# Altium PCB PCB2.PcbDoc
Units mm, origin at the board's own origin, x right, y up, seen from the top; angles counter-clockwise.
Board outline 36.2 x 17.02 mm, 2 copper layers (Top Layer, Bottom Layer); 14 components, 8 nets, 36 pads, 3 vias.
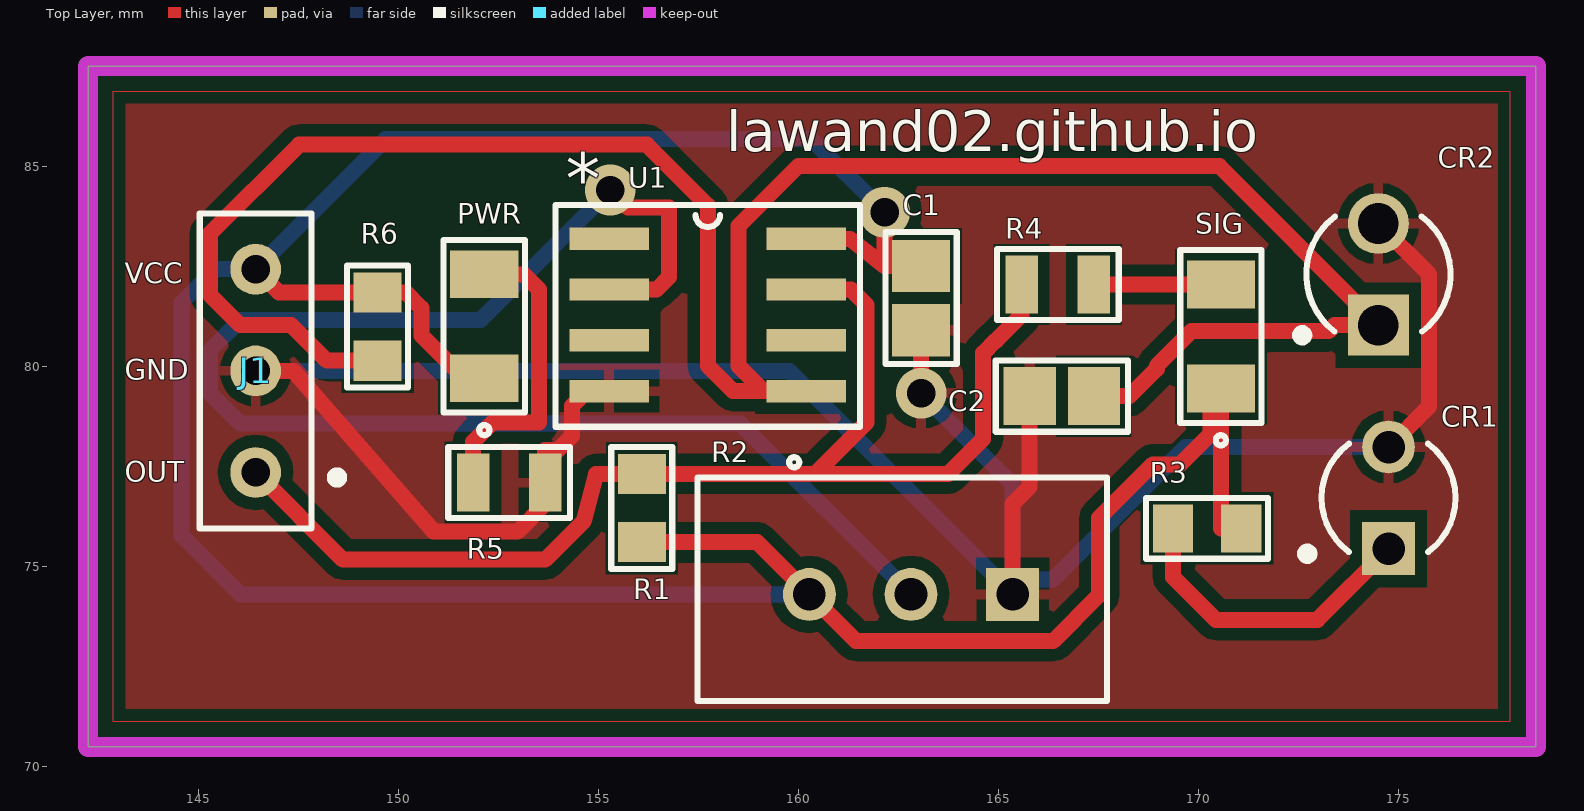
[diagram p0: Top Layer view]
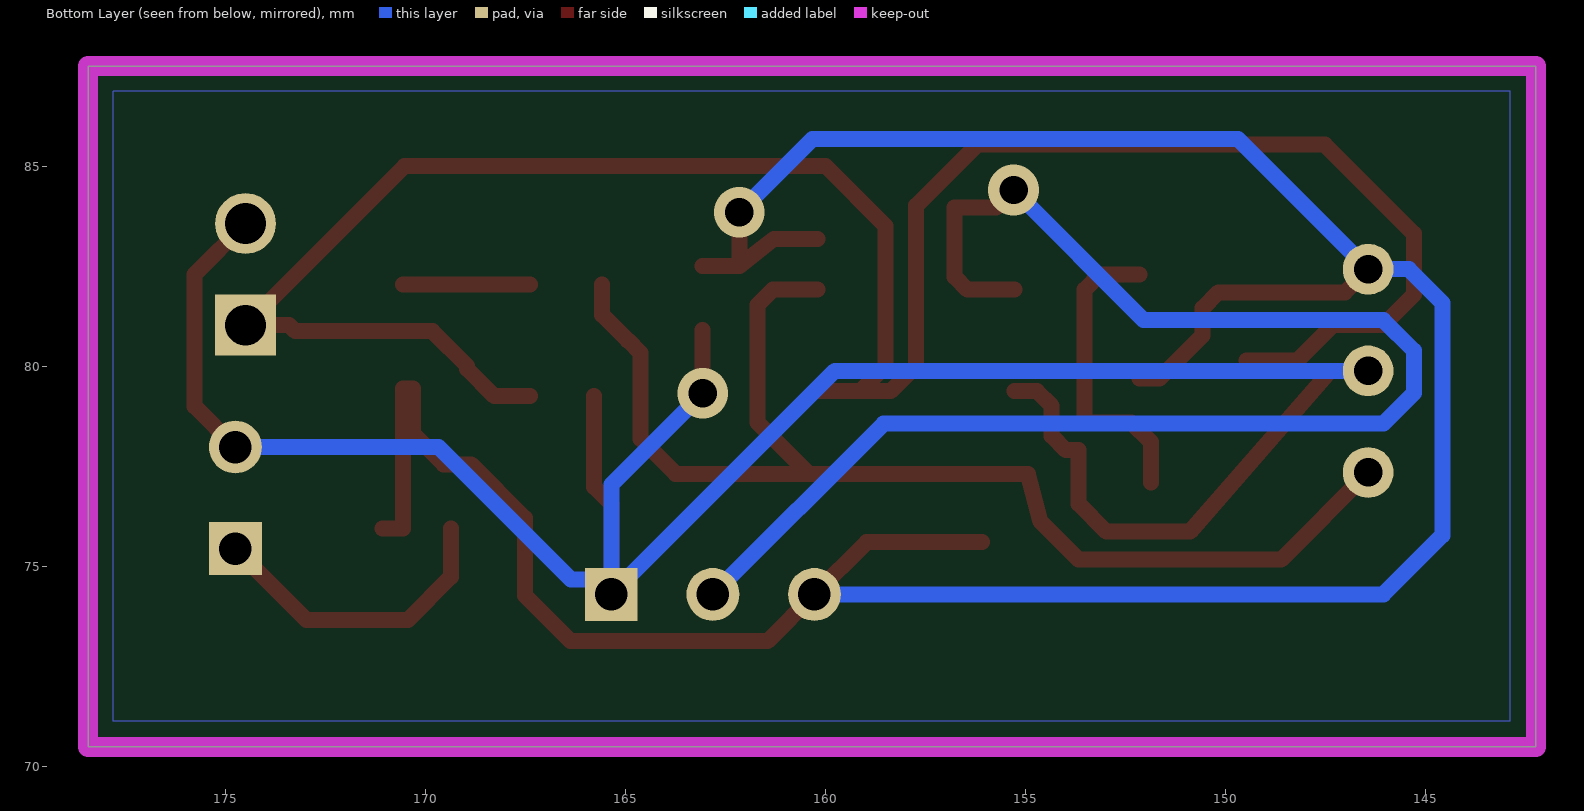
[diagram p1: Bottom Layer view, seen from below]
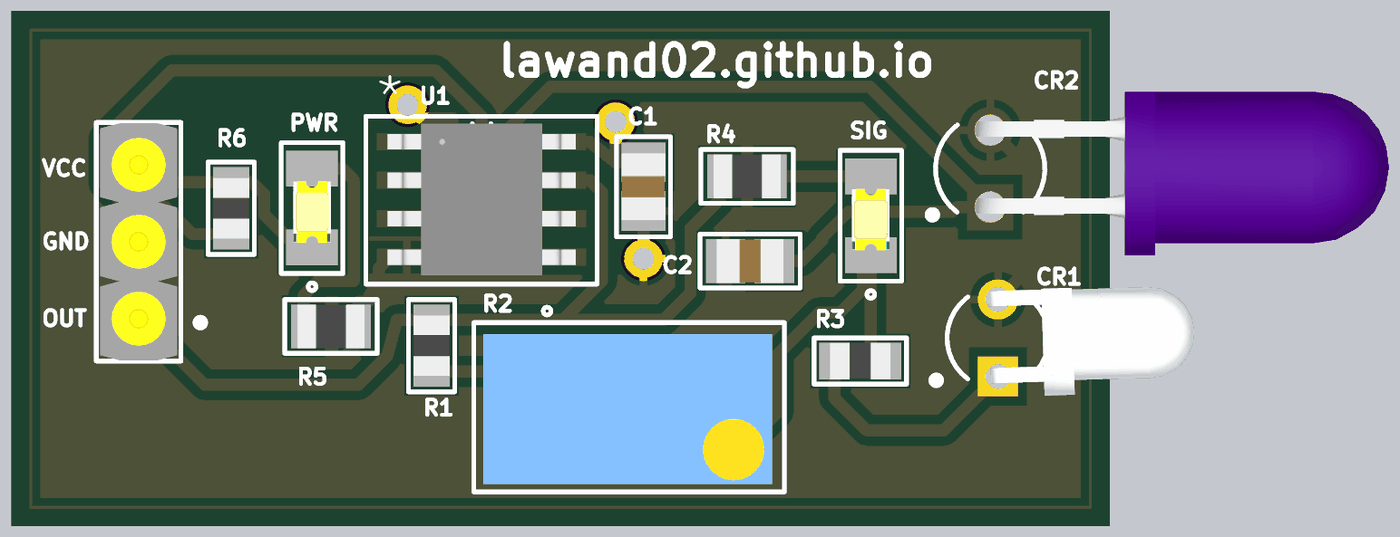
[diagram p2: 3D render of the assembled board from above, using the file's embedded part models]

## Layer stack, top to bottom
Top Solder: solder mask 0.0102, Solder Resist, Dk 3.5
Top Layer: signal copper 0.0356
Dielectric 1: dielectric 0.32, FR-4, Dk 4.8
Bottom Layer: signal copper 0.0356
Bottom Solder: solder mask 0.0102, Solder Resist, Dk 3.5

## Board outline
142.24,70.485 142.24,87.503 178.435,87.503 178.435,70.485

## Design rules (kind name [scope] priority, off if disabled: settings)
Clearance polygon [InNamedPolygon('NONET_L01_P000')] p1: gap=0.5 ignorepadtopadclearanceinfootprint=FALSE
Clearance [All] p2: gap=0.3 ignorepadtopadclearanceinfootprint=FALSE
PolygonConnect [All] p1: connectstyle=Relief reliefconductorwidth=0.254 reliefentries=4 polygonreliefangle="90 Angle" airgapwidth=0.254
RoutingVias [All] p1: holewidth=0.711 width=1.27 viastyle="Through Hole" minholewidth=0.711 minwidth=1.27 maxholewidth=0.711 maxwidth=1.27
SolderMaskExpansion [All] p1: expansion=0.102 istentingtop=FALSE
Width [All] p1: maxlimit=0.5 minlimit=0.254 preferedwidth=0.4
30 further rules are at their usual default settings.

## Components (designator, comment, footprint, x,y, rotation, side; value= is the part's Value field where it differs from the comment)
C1 "100 nF" C0805C104M8RAC7800 163.068,81.702 r90 top
C2 "100 nF" C0805C104M8RAC7800 166.583,79.248 r0 top
CR1 "TEPT4400" TEPT4400 174.752,75.438 r90 top
CR2 "TSAL6200" TSAL6200 174.498,83.566 r90 top
J1 "TS-103-T-A" TS-103-T-A 146.431,79.883 r90 top
PWR "POWER LED" CMD15-21VRD/TR8 152.146,80.996 r90 top (schematic designator LED2)
R1 "10 K" ERJ-6GEYJ103V 156.083,76.454 r270 top
R2 "10 K" 3296W-1-103LF 165.354,74.295 r180 top
R3 "100 R" RC0805N_PAN 170.216,75.946 r0 top
R4 "1 K" RNCF0805TKY1K00 166.484,82.042 r0 top
R5 "1 K" RNCF0805TKY1K00 152.768,77.089 r180 top
R6 "10 K" ERJ-6GEYJ103V 149.479,80.99 r90 top
SIG "SWITCH LED" CMD15-21VRD/TR8 170.561,80.742 r90 top (schematic designator LED1)
U1 "LM393DR" LM393DR 157.734,81.28 r0 top

## Footprints (in the part's own frame and the unit in brackets; to place one, negate y for a bottom-side part, rotate by r counter-clockwise, add the part's x,y. Pads: shape width x height; smd on the part's side, far side on the other; paste and mask are expansions set on the pad)
3296W-1-103LF [mil]
  round 52 / inner round 60 / far side round 52 hole 32 paste-26 mask+0: 1(200,0) 2(100,0)
  rect 52x52 / inner round 60 / far side rect 52x52 hole 32 paste-26 mask+0: 3(0,0)
  silkscreen extent -93,-135 310,105, body extent -77,-100 298,95, height 378
C0805C104M8RAC7800 [mm]
  rect 1.306x1.45 smd paste+0 mask+0: 1(-0.803,0) 2(0.803,0)
  silkscreen extent -1.65,-0.89 1.65,0.89, body extent -1.1,-0.72 1.1,0.72, height 0.88
CMD15-21VRD/TR8 [mil]
  rect 47x67 smd paste+0 mask+0: 1(-51.18,0) 2(51.18,0)
  silkscreen extent -107,-40 85,40, body extent -45,-25 35,25, height 43
ERJ-6GEYJ103V [mm]
  rect 1.006x1.2 smd paste+0 mask+0: 1(-0.853,0) 2(0.853,0)
  silkscreen extent -1.52,-0.76 1.52,0.76, body extent -1,-0.6 1,0.6, height 0.71
LM393DR [mil]
  rect 78x22 smd paste-39 mask-39: 1(-97,75) 2(-97,25) 3(-97,-25) 4(-97,-75) 5(97,-75) 6(97,-25) 7(97,25) 8(97,75)
  silkscreen extent -150,-110 150,108, body extent -122,-99 122,99, height 69
RC0805N_PAN [mm]
  rect 1.006x1.2 smd paste+0 mask+0: 1(-0.853,0) 2(0.853,0)
  silkscreen extent -1.52,-0.76 1.52,0.76, body extent -1,-0.6 1,0.6, height 0.71
RNCF0805TKY1K00 [mil]
  rect 32x57 smd paste+0 mask+0: 1(-35.5,0) 2(35.5,0)
  silkscreen extent -60,-35 60,35, body extent -44,-29 44,29, height 26
TEPT4400 [mil]
  rect 52x52 / inner round 60 / far side rect 52x52 hole 32 paste-26 mask+0: 1(0,0)
  round 52 / inner round 60 / far side round 52 hole 32 paste-26 mask+0: 2(100,0)
  silkscreen extent -10,-66 103,85, body extent -131,-309 240,113, height 144
TS-103-T-A [mil]
  round 50 / inner round 60 / far side round 50 hole 28 paste-25 mask+0: 1(-100,0) 2(0,0) 3(100,0)
  silkscreen extent -155,-85 155,55, body extent -154,-50 154,50, height 327
TSAL6200 [mil]
  rect 60x60 / inner round 60 / far side rect 60x60 hole 40 paste-30 mask-30: 1(-100,0)
  round 60 hole 40 paste-30 mask-30: 2(0,0)
  silkscreen extent -115,-71 7,80, body extent -162,-517 50,20, height 124

## Part data
C1 C2: library part C0805C104M8RACTU, "CAP CER 0.1UF 10V X7R 0805", P/N=C0805C104M8RAC7800
CR1: "Phototransistors 570nm Top View Radial", P/N=TEPT4400
CR2: "Infrared (IR) Emitter 940nm 1.35V 100mA 40mW/sr @ 100mA 34° Radial, 5mm Dia (T 1 3/4)", P/N=TSAL6200
J1: "No Description Available", Mfr_Name="Samtec Inc", RefDes=RefDes, Type=Type
PWR SIG: library part CMD15-21VRDTR8, "Red LED Indication - Discrete 1.7V 1206 (3216 Metric)", P/N=CMD15-21VRD/TR8
R1 R6: library part ERJ-6GEYJ103V, "10 kOhms ±5% 0.125W, 1/8W Chip Resistor 0805 (2012 Metric) Automotive AEC-Q200 Thick Film", P/N=ERJ-6GEYJ103V
R2: library part 3296W-1-103LF, "10 kOhms 0.5W, 1/2W PC Pins Through Hole Trimmer Potentiometer Cermet 25.0 Turn Top Adjustment", P/N=3296W-1-103LF
R3: library part ERA-6AEB101V, "RES SMD 100 OHM 0.1% 1/8W 0805", P/N=ERA-6AEB101V
R4 R5: library part RNCF0805TKY1K00, "RES SMD 1K OHM 0.01% 1/8W 0805", P/N=RNCF0805TKY1K00
U1: "IC COMPARATOR 2 DIFF 8SOIC", P/N=LM393DR

## Via types
v1: diameter 1.27, hole 0.711, Top Layer to Bottom Layer, 3 vias

## Nets (pads, with @x,y where several pads share a name; then routed paths per layer and width w, separated by ;. In a path a pad name is that pad's centre, name@x,y a point inside that pad or via, vN(x,y) a via of type N, cw(c..) or ccw(c..) an arc to the next point about the centre after c; other vN are vias at no path point)
D0: J1.1 R1.1 R4.1 U1.7 | length 31.4
  Top Layer w0.4: J1.1 148.609,75.165 153.67,75.165 154.627,76.122 154.94,77.307 R1.1 160.416,77.307 ; U1.7 161.315,81.915 161.696,81.534 161.696,78.588 160.416,77.307 ; R4.1 165.583,81.28 164.948,80.645 164.935,80.645 164.617,80.328 164.617,78.181 163.743,77.307 160.416,77.307
D1: R2.2 U1.2 | length 37.4
  Top Layer w0.4: U1.2 156.451,81.915 156.769,82.233 156.769,83.964 155.735,83.964 v1(155.296,84.404)
  Bottom Layer w0.4: v1(155.296,84.404) 152.044,81.153 146.05,81.153 145.288,80.391 145.288,79.324 146.05,78.562 158.547,78.562 R2.2
D2: C2.2 CR2.1 R6.1 U1.5 | length 57.7
  Top Layer w0.4: R6.1 148.209,80.137 147.32,81.026 146.05,81.026 145.288,81.788 145.288,83.312 147.515,85.539 156.21,85.539 157.734,84.015 157.734,80.01 158.369,79.375 159.131,79.375 ; U1.5 159.131,79.375 ; C2.2 168.275,79.248 168.961,79.934 168.961,80.01 169.824,80.874 173.253,80.874 173.406,81.026 CR2.1 170.52,85.004 159.997,85.004 158.496,83.502 158.496,80.01 159.131,79.375
GND: C1.1 C2.1 CR1.2 CR2.2 J1.2 R2.3 R5.1 U1.4 | length 64.7
  Top Layer w0.4: J1.2 147.371,79.883 150.881,75.865 152.979,75.865 153.67,76.556 R5.1 153.67,77.899 153.987,77.899 154.344,78.255 154.344,79.007 154.711,79.375 U1.4 ; v1(163.068,79.324) C1.1 ; R2.3 165.354,76.556 165.78,76.982 C2.1 ; CR2.2 175.768,82.296 175.768,78.994 CR1.2
  Bottom Layer w0.4: J1.2 159.766,79.883 R2.3 ; v1(163.068,79.324) 165.354,77.038 R2.3 ; CR1.2 169.672,77.978 166.356,74.662 165.721,74.662 R2.3
NetCR1_1: CR1.1 R3.1 | length 7.8
  Top Layer w0.4: R3.1@169.363,75.946 169.363,74.731 170.434,73.66 172.974,73.66 CR1.1
NetLED1_2: R4.2 SIG.2 | length 3.2
  Top Layer w0.4: R4.2 SIG.2
NetLED2_2: PWR.2 R5.2 | length 7.7
  Top Layer w0.4: R5.2 151.867,78.105 152.349,78.588 153.518,78.588 153.518,81.915 153.137,82.296 PWR.2
VCC: C1.2 J1.3 PWR.1 R1.2 R2.1 R3.2 R6.2 SIG.1 U1.8 | length 77.8
  Top Layer w0.4: J1.3 147.011,81.843 149.479,81.843 150.177,81.843 150.571,81.449 150.571,80.772 151.647,79.696 PWR.1 ; R1.2 158.968,75.601 R2.1 161.442,73.127 166.37,73.127 167.513,74.27 167.513,76.2 168.859,77.546 169.545,77.546 170.307,78.308 170.307,79.442 SIG.1 170.561,75.946 R3.2 ; U1.8 161.29,83.185 162.154,82.505 ; v1(162.154,83.845) 162.154,82.505 ; C1.2 162.154,82.505
  Bottom Layer w0.4: R2.1 146.05,74.295 144.577,75.768 144.577,81.585 145.415,82.423 J1.3 149.682,85.674 160.325,85.674 v1(162.154,83.845)
pads on no net: U1.1 U1.3 U1.6

## Polygon pours and split planes (outlines as drawn)
GND on Top Layer "GND_L01_P000" (solid, remove dead copper, pour order 0): 142.875,71.12 142.875,86.868 177.8,86.868 177.8,71.12

## Keep-outs
Keep-Out Layer:
  the board outline again, w0.5

## Other copper
Multi-Layer:
  lines w0: 142.875,71.12 177.8,71.12 177.8,86.868 142.875,86.868 142.875,71.12

## Silkscreen, mask and mechanical layers (free items; w line width, h text height)
Top Overlay:
  text "lawand02.github.io" at 158.191,85.378 h1.02
  text "VCC" at 143.154,82.067 h0.51
  text "GND" at 143.154,79.654 h0.51
  text "OUT" at 143.154,77.114 h0.51

## Text inside footprints (layer, text, board x,y; h text height)
U1: Top Overlay "*" at 154.178,84.074 h1.27